# EAGLE board MOL-v2-1_MOD-Strips (EAGLE 8.2.2)
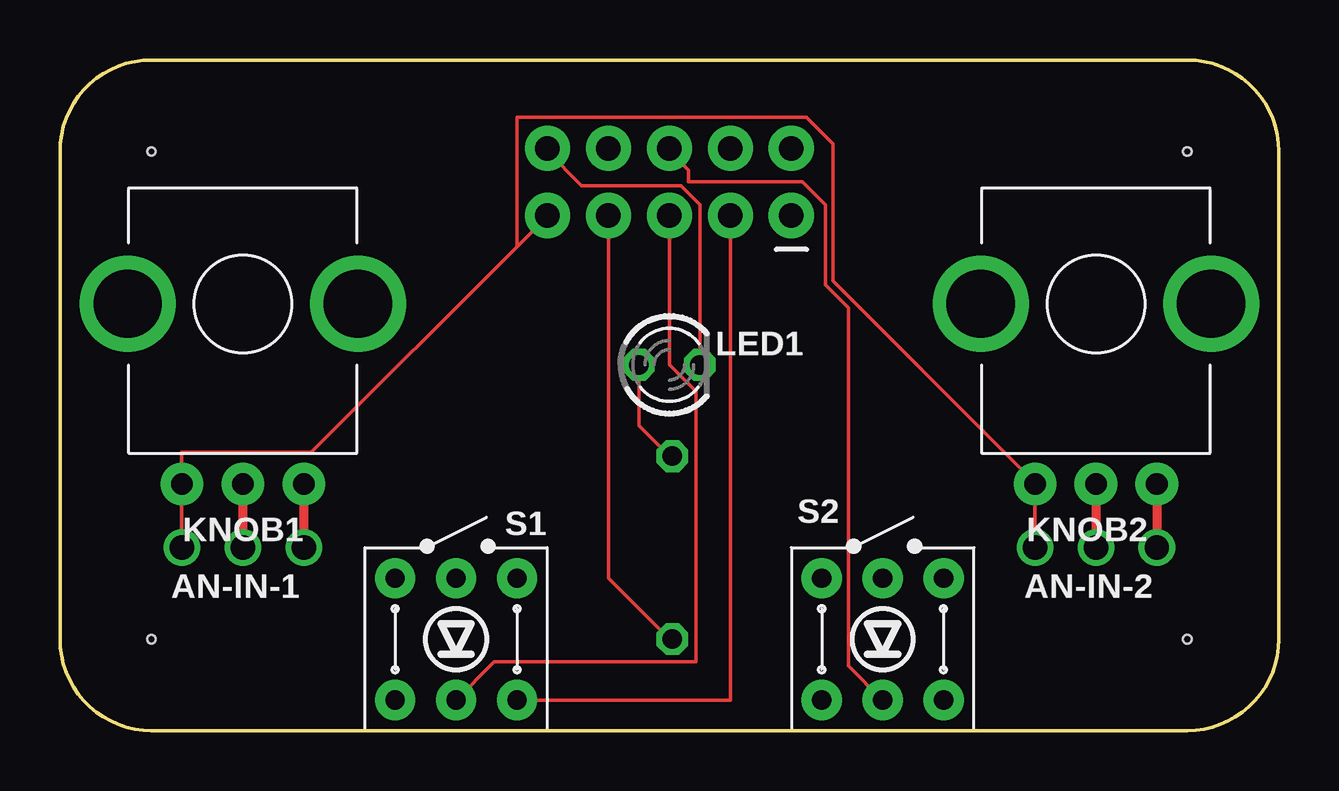
[diagram p0: board, top side]
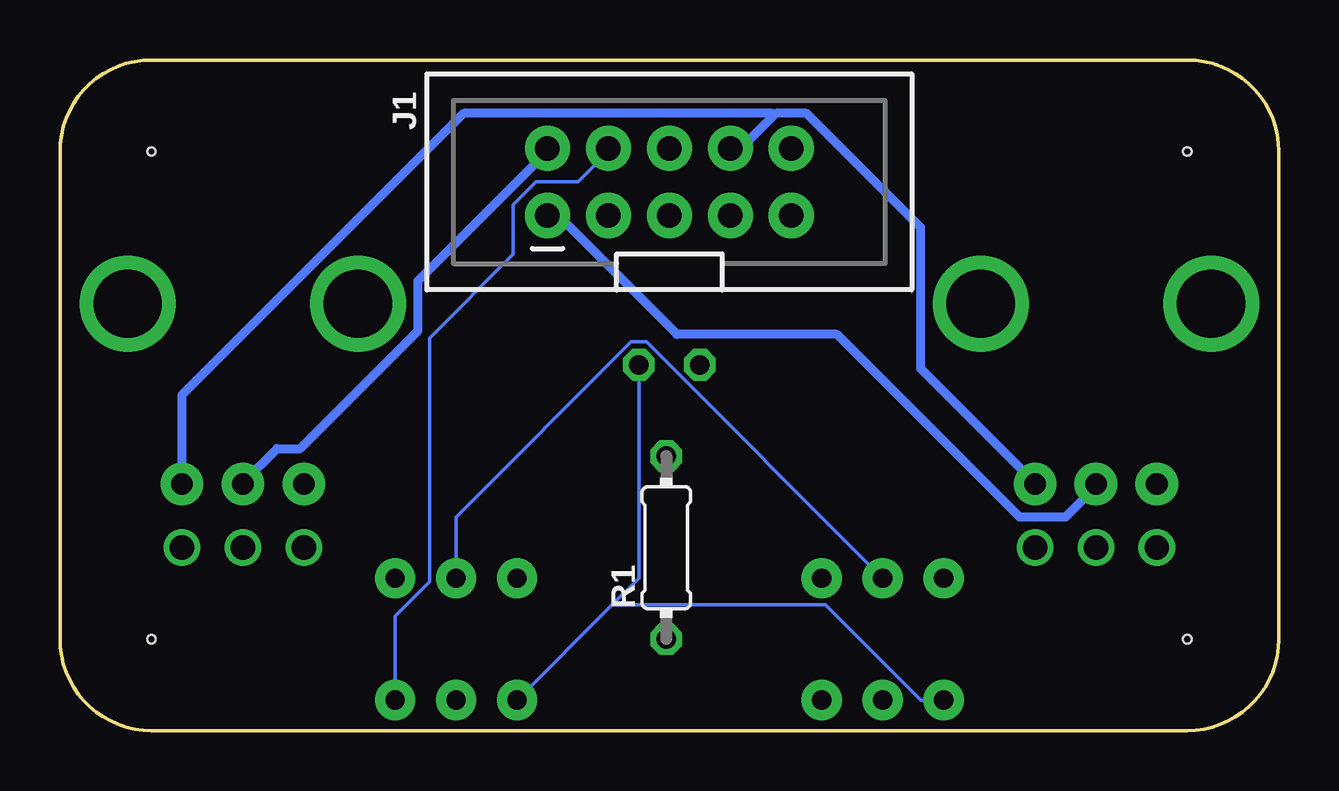
[diagram p1: board, bottom side, seen from below]

Size 50.8 x 27.94 mm. Coordinates in mm from the lower left corner, seen from the top.
Outline: 0,3.81 arc90 3.81,0 46.99,0 arc90 50.8,3.81 50.8,24.13 arc90 46.99,27.94 3.81,27.94 arc90 0,24.13 0,3.81
Copper layers (1*16): Top 0.035mm / dielectric 1.5mm / Bottom 0.035mm
Design rules "default": minimum track width 6mil, minimum drill 0.35mm, track to track 6mil, track to pad 6mil, pad to pad 6mil, via to via 6mil, smd to smd 6mil, copper to edge 40mil, drill to drill 6mil, minimum pad ring 10mil, minimum via ring 8mil, stop-mask expansion 4mil, vias tented up to drill 0mil, thermal gap 10mil
Net classes: 3 Analog Sig: width 0.381 mm, clearance 0.279 mm
Holes 0.35 mm at 3.81,3.81 46.99,3.81 3.81,24.13 46.99,24.13

## Footprints (pad centres in the part's own frame; a part is rotated, then mirrored left to right if it is on the bottom)
1X03_NO_SILK = drill 1.016 pad 1.524: 1 0,0; 2 2.54,0; 3 5.08,0
2X5-SHROUDED_LOCK = drill 1.016 pad 1.88: 1 -1.397,5.08; 2 1.397,5.08; 3 -1.397,2.54; 4 1.397,2.54; 5 -1.397,0; 6 1.397,0; 7 -1.397,-2.54; 8 1.397,-2.54; 9 -1.397,-5.08; 10 1.397,-5.08
TRIM-PCB-9MM = drill 0.9 pad 1.778: 1 -2.54,-7.5; 2 0,-7.5; 3 2.54,-7.5 | drill 2.845 pad 4: 5 -4.8,0; M2 4.8,0
LED3MM = drill 0.813 octagon: A -1.27,0; K 1.27,0
0204/7 = drill 0.813 octagon: 1 -3.81,0; 2 3.81,0
TR2-SWITCH-MOMENTARY-LED = drill 0.8 pad 1.676: 1 2.54,-2.54; 2 2.54,2.54; 3 -2.54,-2.54; 4 -2.54,2.54; A 0,2.54; C 0,-2.54

## Placement (x,y rotation side)
AN-IN-1  [1X03_NO_SILK]  5.08,7.62 0 top
AN-IN-2  [1X03_NO_SILK]  40.64,7.62 0 top
J1  [2X5-SHROUDED_LOCK]  25.4,22.86 90 bottom
KNOB1  [TRIM-PCB-9MM]  7.62,17.78 0 top
KNOB2  [TRIM-PCB-9MM]  43.18,17.78 0 top
LED1  [LED3MM]  25.4,15.24 0 top
R1  220  [0204/7]  25.53,7.62 90 bottom
S1  SW-LEDPTH  [TR2-SWITCH-MOMENTARY-LED]  16.51,3.81 0 top
S2  SW-LEDPTH  [TR2-SWITCH-MOMENTARY-LED]  34.29,3.81 0 top

## Library data of the parts
AN-IN-1 AN-IN-2 = SparkFun-Connectors
J1 = SparkFun-Connectors; PROD_ID: CONN-08671; SF_ID: PRT-08506
KNOB1 KNOB2 S1 S2 = Daniel
LED1 = led
R1 = CMU-ArtFab

## Nets
+3V3: AN-IN-1.1 AN-IN-2.1 J1.9 KNOB1.1 KNOB2.1
AGND [Analog Sig]: AN-IN-1.3 AN-IN-2.3 J1.8 KNOB1.3 KNOB2.3
AN1 [Analog Sig]: AN-IN-1.2 J1.1 KNOB1.2
AN2 [Analog Sig]: AN-IN-2.2 J1.2 KNOB2.2
B1: J1.3 S1.1
B2: J1.4 S2.1
GND: J1.10 LED1.K S1.3 S2.3
LED1: J1.7 R1.1
N1: LED1.A R1.2
PWM_1: J1.5 S1.C
PWM_2: J1.6 S2.C
V+: S1.A S2.A

## Tracks (layer width: path | path; a pad name or v marks a point on that pad's centre or on a via)
+3V3
  Top 0.152: AN-IN-2.1 KNOB2.1 40.64,10.32 32.23,18.73 32.23,24.45 31.11,25.56 19.05,25.56 19.05,20.16 | AN-IN-1.1 KNOB1.1 5.08,11.59 10.48,11.59 19.05,20.16 | 19.05,20.16 20.32,21.43 J1.9
AGND
  Top 0.381: KNOB2.3 AN-IN-2.3 | KNOB1.3 AN-IN-1.3
  Bottom 0.381: 21.03,25.64 20.95,25.72 19.68,25.72 14.92,20.95 14.92,15.08 10.16,10.32 KNOB1.3 | 21.03,25.64 22.38,24.29 22.86,24.29 J1.8 | KNOB2.3 45.72,13.97 33.97,25.72 21.11,25.72 21.03,25.64
AN1
  Top 0.381: KNOB1.2 AN-IN-1.2
  Bottom 0.381: J1.1 30.48,21.43 30,21.43 25.08,16.51 18.41,16.51 10.79,8.89 8.89,8.89 7.62,10.16 KNOB1.2
AN2
  Top 0.381: KNOB2.2 AN-IN-2.2
  Bottom 0.381: J1.2 30.48,24.13 35.88,18.73 35.88,16.67 40.8,11.75 41.75,11.75 43.18,10.32 KNOB2.2
B1
  Top 0.152: S1.1 27.94,1.27 J1.3
B2
  Bottom 0.152: S2.1 36.83,4.76 35.4,6.19 35.4,16.35 31.91,19.84 31.91,21.91 30.96,22.86 29.21,22.86 27.94,24.13 J1.4
GND
  Top 0.152: LED1.K 26.67,21.91 25.88,22.7 21.75,22.7 20.32,24.13 J1.10
  Bottom 0.152: LED1.K 26.67,6.35 27.78,5.24 | S2.3 27.78,5.24 | S1.3 14.92,1.27 18.89,5.24 27.78,5.24
LED1
  Top 0.152: J1.7 22.86,6.35 25.4,3.81 R1.1
N1
  Top 0.152: LED1.A 24.13,12.7 25.4,11.43 R1.2
PWM_1
  Top 0.152: S1.C 18.1,2.86 26.51,2.86 26.51,14.13 25.4,15.24 J1.5
PWM_2
  Top 0.152: S2.C 32.86,2.7 32.86,17.62 31.91,18.57 31.91,21.91 30.96,22.86 26.19,22.86 26.19,23.34 25.4,24.13 J1.6
V+
  Bottom 0.152: S1.A 26.35,16.19 26.99,16.19 34.29,8.89 S2.A